# EAGLE board board_a_50mil (EAGLE 7.1.0), part 1 of 3
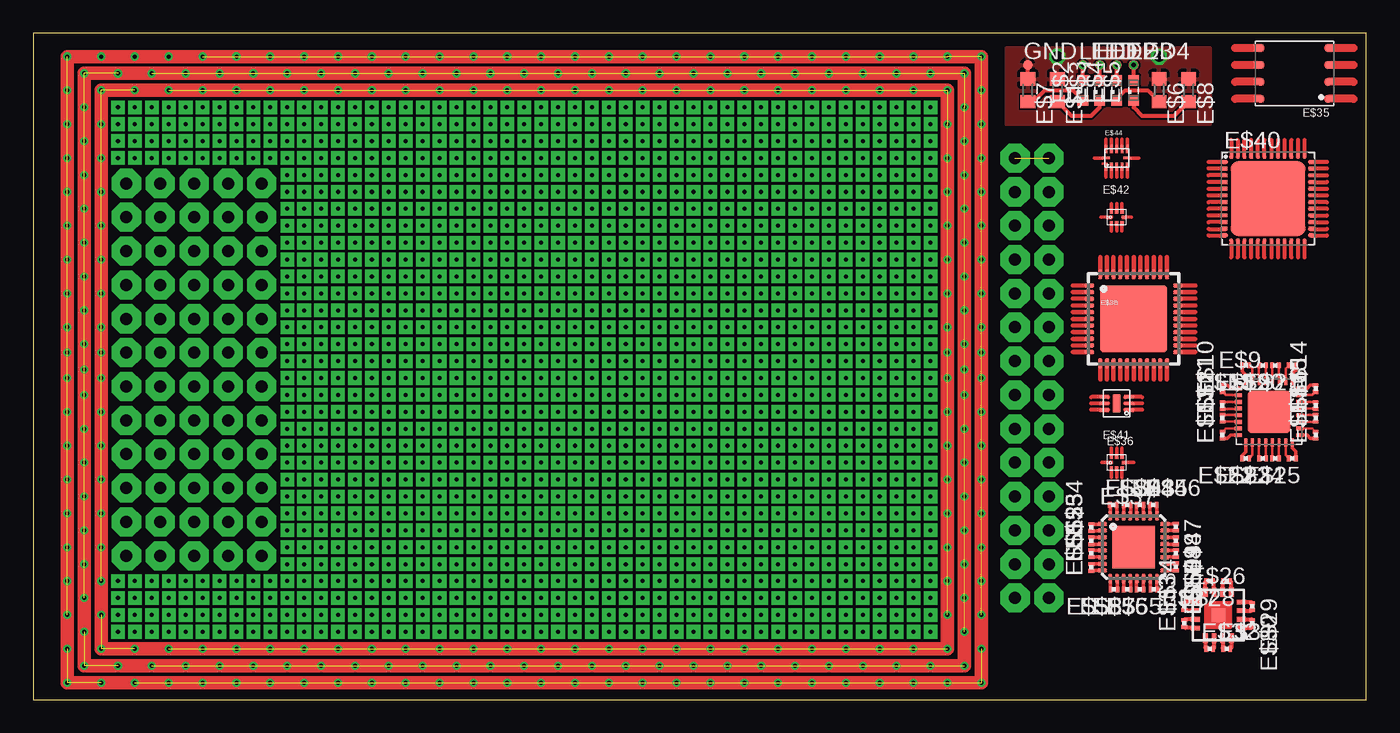
[diagram p0: board, top side]
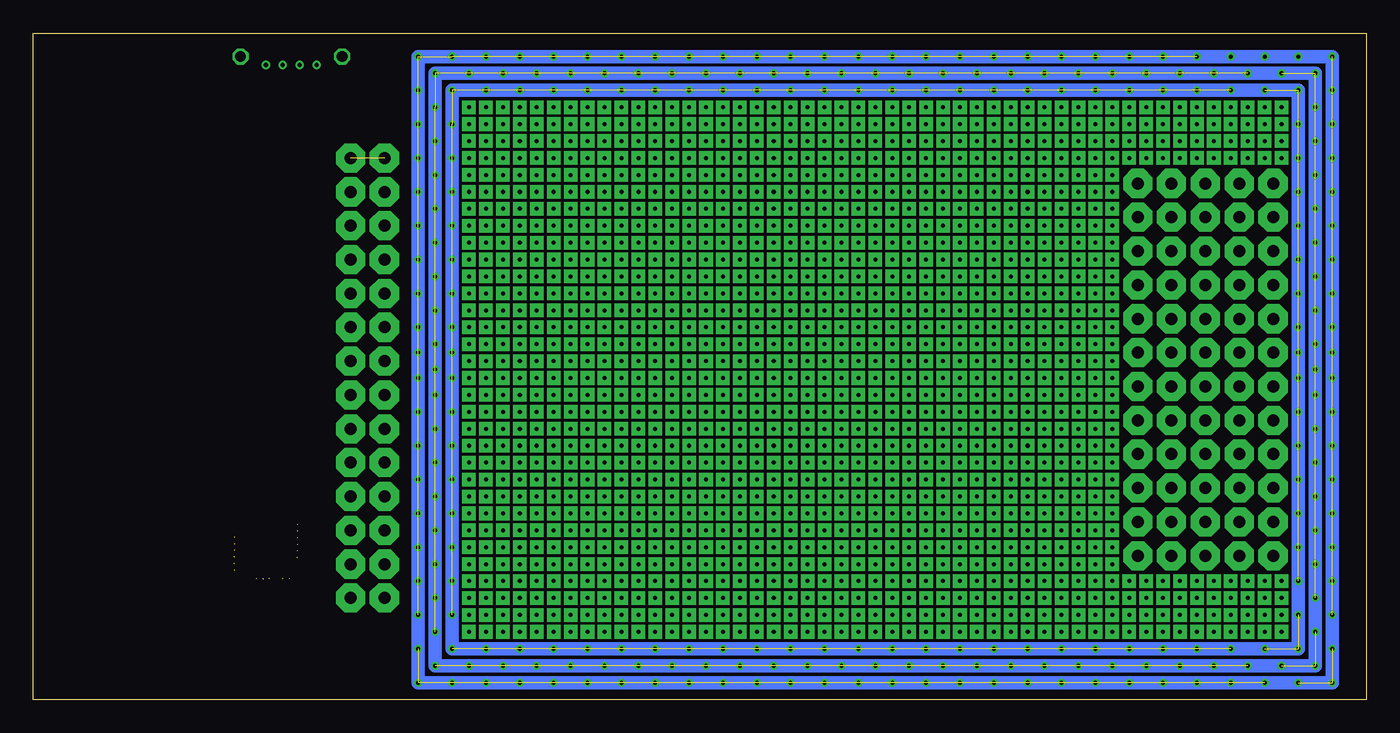
[diagram p1: board, bottom side, seen from below]

Size 100 x 50 mm. Coordinates in mm from the lower left corner, seen from the top.
Outline: 0,0 100,0 100,50 0,50 0,0
Copper layers (1*16): Top 0.035mm / dielectric 1.5mm / Bottom 0.035mm
Design rules "ITEADstudio_DRC *": minimum track width 6mil, minimum drill 12mil, track to track 6mil, track to pad 6mil, pad to pad 6mil, via to via 6mil, smd to smd 0mil, copper to edge 10mil, drill to drill 10mil, minimum pad ring 10mil, minimum via ring 6mil, stop-mask expansion 2mil, vias tented up to drill 100mil, thermal gap 10mil

## Footprints (pad centres in the part's own frame; a part is rotated, then mirrored left to right if it is on the bottom)
R0603 = smd 1 x 1.1: 1 -0.85,0; 2 0.85,0
SML0603 = smd 0.8 x 0.8: A 0.75,0; C -0.75,0
QFN32 = smd 0.6 x 0.3: 1 -2.3,1.75; 2 -2.3,1.25; 3 -2.3,0.75; 4 -2.3,0.25; 5 -2.3,-0.25; 6 -2.3,-0.75; 7 -2.3,-1.25; 8 -2.3,-1.75; 17 2.3,-1.75; 18 2.3,-1.25; 19 2.3,-0.75; 20 2.3,-0.25; 21 2.3,0.25; 22 2.3,0.75; 23 2.3,1.25; 24 2.3,1.75 | smd 0.3 x 0.6: 9 -1.75,-2.3; 10 -1.25,-2.3; 11 -0.75,-2.3; 12 -0.25,-2.3; 13 0.25,-2.3; 14 0.75,-2.3; 15 1.25,-2.3; 16 1.75,-2.3; 25 1.75,2.3; 26 1.25,2.3; 27 0.75,2.3; 28 0.25,2.3; 29 -0.25,2.3; 30 -0.75,2.3; 31 -1.25,2.3; 32 -1.75,2.3 | smd 3.2 x 3.2: EXP 0,0
R0201 = smd 0.28 x 0.43: 1 -0.255,0; 2 0.255,0
QFN16 = smd 0.7 x 0.35: 1 -1.725,0.975; 2 -1.725,0.325; 3 -1.725,-0.325; 4 -1.725,-0.975; 9 1.725,-0.975; 10 1.725,-0.325; 11 1.725,0.325; 12 1.725,0.975 | smd 0.35 x 0.7: 5 -0.975,-1.725; 6 -0.325,-1.725; 7 0.325,-1.725; 8 0.975,-1.725; 13 0.975,1.725; 14 0.325,1.725; 15 -0.325,1.725; 16 -0.975,1.725 | smd 1 x 1: TAB 0,0
DFN-S = smd 0.7 x 0.5: 1 -2.69,1.905; 2 -2.69,0.635; 3 -2.69,-0.635; 4 -2.69,-1.905; 5 2.69,-1.905; 6 2.69,-0.635; 7 2.69,0.635; 8 2.69,1.905
DFN6 = smd 0.25 x 0.7: 1 -0.5,-0.925; 2 0,-0.925; 3 0.5,-0.925; 4 0.5,0.925; 5 0,0.925; 6 -0.5,0.925 | smd 1.42 x 0.61: GND 0,0
MLF32-TH = smd 0.7 x 0.3: 1 -2.35,1.75; 2 -2.35,1.25; 3 -2.35,0.75; 4 -2.35,0.25; 5 -2.35,-0.25; 6 -2.35,-0.75; 7 -2.35,-1.25; 8 -2.35,-1.75; 17 2.35,-1.75; 18 2.35,-1.25; 19 2.35,-0.75; 20 2.35,-0.25; 21 2.35,0.25; 22 2.35,0.75; 23 2.35,1.25; 24 2.35,1.75 | smd 0.3 x 0.7: 9 -1.75,-2.35; 10 -1.25,-2.35; 11 -0.75,-2.35; 12 -0.25,-2.35; 13 0.25,-2.35; 14 0.75,-2.35; 15 1.25,-2.35; 16 1.75,-2.35; 25 1.75,2.35; 26 1.25,2.35; 27 0.75,2.35; 28 0.25,2.35; 29 -0.25,2.35; 30 -0.75,2.35; 31 -1.25,2.35; 32 -1.75,2.35 | smd 3.2 x 3.2: TH 0,0
MLF44-TH = smd 0.7 x 0.3: 1 -3.325,2.5; 2 -3.325,2; 3 -3.325,1.5; 4 -3.325,1; 5 -3.325,0.5; 6 -3.325,0; 7 -3.325,-0.5; 8 -3.325,-1; 9 -3.325,-1.5; 10 -3.325,-2; 11 -3.325,-2.5; 23 3.325,-2.5; 24 3.325,-2; 25 3.325,-1.5; 26 3.325,-1; 27 3.325,-0.5; 28 3.325,0; 29 3.325,0.5; 30 3.325,1; 31 3.325,1.5; 32 3.325,2; 33 3.325,2.5 | smd 0.3 x 0.7: 12 -2.5,-3.325; 13 -2,-3.325; 14 -1.5,-3.325; 15 -1,-3.325; 16 -0.5,-3.325; 17 0,-3.325; 18 0.5,-3.325; 19 1,-3.325; 20 1.5,-3.325; 21 2,-3.325; 22 2.5,-3.325; 34 2.5,3.325; 35 2,3.325; 36 1.5,3.325; 37 1,3.325; 38 0.5,3.325; 39 0,3.325; 40 -0.5,3.325; 41 -1,3.325; 42 -1.5,3.325; 43 -2,3.325; 44 -2.5,3.325 | smd 5 x 5: TH 0,0
QFN48 = smd 0.5 x 0.3: 1 -3.25,2.75; 2 -3.25,2.25; 3 -3.25,1.75; 4 -3.25,1.25; 5 -3.25,0.75; 6 -3.25,0.25; 7 -3.25,-0.25; 8 -3.25,-0.75; 9 -3.25,-1.25; 10 -3.25,-1.75; 11 -3.25,-2.25; 12 -3.25,-2.75; 25 3.25,-2.75; 26 3.25,-2.25; 27 3.25,-1.75; 28 3.25,-1.25; 29 3.25,-0.75; 30 3.25,-0.25; 31 3.25,0.25; 32 3.25,0.75; 33 3.25,1.25; 34 3.25,1.75; 35 3.25,2.25; 36 3.25,2.75 | smd 0.3 x 0.5: 13 -2.75,-3.25; 14 -2.25,-3.25; 15 -1.75,-3.25; 16 -1.25,-3.25; 17 -0.75,-3.25; 18 -0.25,-3.25; 19 0.25,-3.25; 20 0.75,-3.25; 21 1.25,-3.25; 22 1.75,-3.25; 23 2.25,-3.25; 24 2.75,-3.25; 37 2.75,3.25; 38 2.25,3.25; 39 1.75,3.25; 40 1.25,3.25; 41 0.75,3.25; 42 0.25,3.25; 43 -0.25,3.25; 44 -0.75,3.25; 45 -1.25,3.25; 46 -1.75,3.25; 47 -2.25,3.25; 48 -2.75,3.25 | smd 5.6 x 5.6: EXP 0,0
UMLP8 = smd 0.25 x 0.25: 1 -0.6,0 | smd 0.25 x 0.35: 2 -0.4,-0.45; 3 0,-0.45; 4 0.4,-0.45; 6 0.4,0.45; 7 0,0.45; 8 -0.4,0.45 | smd 0.35 x 0.25: 5 0.55,0
UQFN12 = smd 0.2 x 0.6: 1 -0.8,-0.65; 2 -0.4,-0.65; 3 0,-0.65; 4 0.4,-0.65; 5 0.8,-0.65; 7 0.8,0.65; 8 0.4,0.65; 9 0,0.65; 10 -0.4,0.65; 11 -0.8,0.65 | smd 0.6 x 0.2: 6 0.8,0; 12 -0.8,0
TP07R = smd 0.7 x 0.7: TP 0,0

## Placement (x,y rotation side)
E$1  [R0603]  76.83,45.72 270 top
E$2  [SML0603]  78.74,45.72 90 top
E$3  [SML0603]  80.01,45.72 90 top
E$4  [SML0603]  81.28,45.72 90 top
E$5  [SML0603]  82.55,45.72 90 top
E$6  [R0603]  84.45,45.72 270 top
E$7  [R0603]  74.61,45.72 270 top
E$8  [R0603]  86.68,45.72 270 top
E$9  [QFN32]  92.71,21.59 0 top
E$10  [R0201]  89.22,23.34 90 top
E$11  [R0201]  89.22,22.07 90 top
E$12  [R0201]  89.22,21.11 90 top
E$13  [R0201]  89.22,19.84 90 top
E$14  [R0201]  96.2,23.34 90 top
E$15  [R0201]  96.2,22.07 90 top
E$16  [R0201]  96.2,21.11 90 top
E$17  [R0201]  96.2,19.84 90 top
E$18  [R0201]  90.96,25.08 180 top
E$19  [R0201]  92.23,25.08 180 top
E$20  [R0201]  93.19,25.08 180 top
E$21  [R0201]  94.46,25.08 180 top
E$22  [R0201]  90.96,18.1 180 top
E$23  [R0201]  92.23,18.1 180 top
E$24  [R0201]  93.19,18.1 180 top
E$25  [R0201]  94.46,18.1 180 top
E$26  [QFN16]  88.9,6.35 0 top
E$27  [R0201]  88.27,8.89 180 top
E$28  [R0201]  89.53,8.89 180 top
E$29  [R0201]  91.44,6.99 270 top
E$30  [R0201]  91.44,5.71 270 top
E$31  [R0201]  89.53,3.81 0 top
E$32  [R0201]  88.27,3.81 0 top
E$33  [R0201]  86.36,5.71 90 top
E$34  [R0201]  86.36,6.99 90 top
E$35  [DFN-S]  94.61,46.99 180 top
E$36  [DFN6]  81.28,22.23 90 top
E$37  [MLF32-TH]  82.55,11.43 0 top
E$38  [MLF44-TH]  82.55,28.57 0 top
E$39  [R0201]  81.03,14.61 0 top
E$40  [QFN48]  92.63,37.59 0 top
E$41  [UMLP8]  81.28,17.78 0 top
E$42  [UMLP8]  81.28,36.2 0 top
E$43  [R0201]  82.07,14.61 0 top
E$44  [UQFN12]  81.28,40.64 0 top
E$45  [R0201]  83.03,14.61 0 top
E$46  [R0201]  84.02,14.61 0 top
E$47  [R0201]  85.72,12.95 270 top
E$48  [R0201]  85.72,11.91 270 top
E$49  [R0201]  85.72,10.95 270 top
E$50  [R0201]  85.72,9.96 270 top
E$51  [R0201]  79.38,9.91 90 top
E$52  [R0201]  79.38,10.95 90 top
E$53  [R0201]  79.38,11.91 90 top
E$54  [R0201]  79.38,12.9 90 top
E$55  [R0201]  84.07,8.26 180 top
E$56  [R0201]  83.03,8.26 180 top
E$57  [R0201]  82.07,8.26 180 top
E$58  [R0201]  81.08,8.26 180 top
GND_LED  [TP07R]  74.61,47.62 0 top
LED1  [TP07R]  78.74,47.62 0 top
LED2  [TP07R]  80.01,47.62 0 top
LED3  [TP07R]  81.28,47.62 0 top
LED4  [TP07R]  82.55,47.62 0 top

## Library data of the parts
E$1 E$6-E$8 E$10-E$25 E$27-E$34 E$39 E$43 E$45-E$58 = rcl
E$2-E$5 = led
E$9 = freescale
E$26 = ftdichip
E$35-E$38 E$40-E$42 E$44 = ibr_node
GND_LED LED1-LED4 = testpad

## Nets
GND: E$1.1 E$6.1 E$7.1 E$8.1 GND_LED.TP
LED1: E$2.A LED1.TP
LED2: E$3.A LED2.TP
LED3: E$4.A LED3.TP
LED4: E$5.A LED4.TP
S$128: E$37.32 E$39.1
S$131: E$37.31 E$39.2
S$132: E$37.30 E$43.1
S$136: E$37.29 E$43.2
S$137: E$37.28 E$45.1
S$142: E$37.27 E$45.2
S$289: E$37.26 E$46.1
S$290: E$37.25 E$46.2
S$291: E$37.24 E$47.1
S$292: E$37.23 E$47.2
S$293: E$37.22 E$48.1
S$294: E$37.21 E$48.2
S$295: E$37.20 E$49.1
S$296: E$37.19 E$49.2
S$297: E$37.18 E$50.1
S$298: E$37.17 E$50.2
S$299: E$37.8 E$51.1
S$300: E$37.7 E$51.2
S$301: E$37.6 E$52.1
S$302: E$37.5 E$52.2
S$303: E$37.4 E$53.1
S$304: E$37.3 E$53.2
S$305: E$37.2 E$54.1
S$306: E$37.1 E$54.2
S$307: E$37.16 E$55.1
S$308: E$37.15 E$55.2
S$309: E$37.14 E$56.1
S$310: E$37.13 E$56.2
S$311: E$37.12 E$57.1
S$312: E$57.2
S$313: E$37.10 E$58.1
S$314: E$37.9 E$58.2
S$1569: E$1.2 E$3.C
S$1570: E$4.C E$6.2
S$1571: E$5.C E$8.2
S$1572: E$2.C E$7.2
S$1573: E$9.1 E$10.2
S$1574: E$9.2 E$10.1
S$1575: E$9.3 E$11.2
S$1576: E$9.4 E$11.1
S$1577: E$9.5 E$12.2
S$1578: E$9.6 E$12.1
S$1579: E$9.7 E$13.2
S$1580: E$9.8 E$13.1
S$1581: E$9.24 E$14.2
S$1582: E$9.23 E$14.1
S$1583: E$9.22 E$15.2
S$1584: E$9.21 E$15.1
S$1585: E$9.20 E$16.2
S$1586: E$9.19 E$16.1
S$1587: E$9.18 E$17.2
S$1588: E$9.17 E$17.1
S$1589: E$9.32 E$18.2
S$1590: E$9.31 E$18.1
S$1591: E$9.30 E$19.2
S$1592: E$9.29 E$19.1
S$1593: E$9.28 E$20.2
S$1594: E$9.27 E$20.1
S$1595: E$9.26 E$21.2
S$1596: E$9.25 E$21.1
S$1597: E$9.9 E$22.2
S$1598: E$9.10 E$22.1
S$1599: E$9.11 E$23.2
S$1600: E$9.12 E$23.1
S$1601: E$9.13 E$24.2
S$1602: E$9.14 E$24.1
S$1603: E$9.15 E$25.2
S$1604: E$9.16 E$25.1
S$1660: E$26.16 E$27.2
S$1661: E$26.15 E$27.1
S$1662: E$26.14 E$28.2
S$1663: E$26.13 E$28.1
S$1664: E$26.12 E$29.1
S$1665: E$26.11 E$29.2
S$1666: E$26.10 E$30.1
S$1667: E$26.9 E$30.2
S$1668: E$26.8 E$31.2
S$1669: E$26.7 E$31.1
S$1670: E$26.6 E$32.2
S$1671: E$26.5 E$32.1
S$1672: E$26.4 E$33.1
S$1673: E$26.3 E$33.2
S$1674: E$26.2 E$34.1
S$1675: E$26.1 E$34.2

## Tracks (layer width: path | path; a pad name or v marks a point on that pad's centre or on a via)
GND  (via drill 0.8 pad 0.81)
  Top 0.305: E$7.1 GND_LED.TP
  other vias: 76.83,48.26 84.45,48.26
  pour Top: 73.03,48.9 88.27,48.9 88.27,43.18 73.03,43.18
LED1  (via drill 0.3)
  Top 0.305: E$2.A LED1.TP
  other vias: 78.74,47.62
LED2  (via drill 0.3)
  Top 0.305: E$3.A LED2.TP
  other vias: 80.01,47.62
LED3  (via drill 0.3)
  Top 0.305: E$4.A LED3.TP
  other vias: 81.28,47.62
LED4  (via drill 0.3)
  Top 0.305: E$5.A LED4.TP
  other vias: 82.55,47.62
PS1  (via drill 0.3)  (80 unrouted)
  Top 1.016: v68.58,45.72 v5.08,45.72 | v5.08,45.72 v5.08,3.81 v68.58,3.81 v68.58,45.72 | v68.58,45.72 v5.08,45.72
  Bottom 1.016: v5.08,45.72 v5.08,3.81 v68.58,3.81 v68.58,45.72 v5.08,45.72
  other vias: 5.08,43.18 5.08,40.64 5.08,38.1 5.08,35.56 5.08,33.02 5.08,30.48 5.08,27.94 5.08,26.04 5.08,24.13 5.08,21.59 5.08,19.05 5.08,16.51 5.08,13.97 5.08,11.43 5.08,8.89 5.08,6.35 68.58,24.13 68.58,21.59 68.58,19.05 68.58,16.51 68.58,13.97 68.58,11.43 68.58,8.89 68.58,6.35 68.58,43.18 68.58,40.64 68.58,38.1 68.58,35.56 68.58,33.02 68.58,30.48 68.58,27.94 68.58,26.04 7.62,3.81 10.16,3.81 12.7,3.81 15.24,3.81 17.78,3.81 20.32,3.81 22.86,3.81 25.4,3.81 27.94,3.81 30.48,3.81 33.02,3.81 35.56,3.81 38.1,3.81 40.64,3.81 43.18,3.81 45.72,3.81 48.26,3.81 50.8,3.81 53.34,3.81 55.88,3.81 58.42,3.81 60.96,3.81 63.5,3.81 66.04,3.81 66.04,45.72 63.5,45.72 60.96,45.72 58.42,45.72 55.88,45.72 53.34,45.72 50.8,45.72 48.26,45.72 45.72,45.72 43.18,45.72 40.64,45.72 7.62,45.72 10.16,45.72 12.7,45.72 15.24,45.72 17.78,45.72 20.32,45.72 22.86,45.72 25.4,45.72 27.94,45.72 30.48,45.72 33.02,45.72 35.56,45.72 38.1,45.72
PS2  (via drill 0.3)  (84 unrouted)
  Top 1.016: v69.85,46.99 v3.81,46.99 v3.81,2.54 v69.85,2.54 v69.85,46.99
  Bottom 1.016: v69.85,46.99 v3.81,46.99 v3.81,2.54 v69.85,2.54 v69.85,46.99
  other vias: 3.81,44.45 3.81,41.91 3.81,39.37 3.81,36.83 3.81,34.29 3.81,31.75 3.81,29.21 3.81,5.08 3.81,26.67 3.81,22.86 3.81,24.77 3.81,20.32 3.81,17.78 3.81,15.24 3.81,12.7 3.81,10.16 3.81,7.62 69.85,5.08 69.85,22.86 69.85,24.77 69.85,20.32 69.85,17.78 69.85,15.24 69.85,12.7 69.85,10.16 69.85,7.62 69.85,44.45 69.85,41.91 69.85,39.37 69.85,36.83 69.85,34.29 69.85,31.75 69.85,29.21 69.85,26.67 6.35,2.54 8.89,2.54 11.43,2.54 13.97,2.54 16.51,2.54 19.05,2.54 21.59,2.54 24.13,2.54 26.67,2.54 29.21,2.54 31.75,2.54 34.29,2.54 36.83,2.54 39.37,2.54 41.91,2.54 44.45,2.54 46.99,2.54 49.53,2.54 52.07,2.54 54.61,2.54 57.15,2.54 59.69,2.54 62.23,2.54 64.77,2.54 67.31,2.54 6.35,46.99 8.89,46.99 11.43,46.99 13.97,46.99 16.51,46.99 19.05,46.99 21.59,46.99 24.13,46.99 26.67,46.99 29.21,46.99 31.75,46.99 34.29,46.99 36.83,46.99 39.37,46.99 41.91,46.99 44.45,46.99 46.99,46.99 49.53,46.99 52.07,46.99 54.61,46.99 57.15,46.99 59.69,46.99 62.23,46.99 64.77,46.99 67.31,46.99
PS3  (via drill 0.3)  (85 unrouted)
  Top 1.016: v71.12,48.26 v10.16,48.26 v7.62,48.26 v5.08,48.26 v2.54,48.26 v2.54,1.27 v71.12,1.27 v71.12,48.26
  Bottom 1.016: v71.12,48.26 v2.54,48.26 v2.54,1.27 v71.12,1.27 v71.12,48.26
  other vias: 63.5,48.26 66.04,48.26 68.58,48.26 53.34,48.26 55.88,48.26 58.42,48.26 60.96,48.26 43.18,48.26 45.72,48.26 48.26,48.26 50.8,48.26 33.02,48.26 35.56,48.26 38.1,48.26 40.64,48.26 22.86,48.26 25.4,48.26 27.94,48.26 30.48,48.26 12.7,48.26 15.24,48.26 17.78,48.26 20.32,48.26 2.54,45.72 2.54,43.18 2.54,40.64 2.54,38.1 2.54,35.56 2.54,3.81 68.58,1.27 66.04,1.27 63.5,1.27 60.96,1.27 58.42,1.27 55.88,1.27 53.34,1.27 50.8,1.27 48.26,1.27 45.72,1.27 43.18,1.27 40.64,1.27 38.1,1.27 35.56,1.27 33.02,1.27 30.48,1.27 27.94,1.27 25.4,1.27 22.86,1.27 20.32,1.27 17.78,1.27 5.08,1.27 7.62,1.27 10.16,1.27 12.7,1.27 15.24,1.27 2.54,33.02 2.54,30.48 2.54,27.94 2.54,21.59 2.54,19.05 2.54,16.51 2.54,13.97 2.54,11.43 2.54,8.89 2.54,6.35 2.54,24.13 2.54,26.04 71.12,24.13 71.12,26.04 71.12,45.72 71.12,43.18 71.12,40.64 71.12,38.1 71.12,35.56 71.12,3.81 71.12,33.02 71.12,30.48 71.12,27.94 71.12,21.59 71.12,19.05 71.12,16.51 71.12,13.97 71.12,11.43 71.12,8.89 71.12,6.35
S$1  (via drill 0.3 pad 1.02)
  other vias: 8.89,44.45
S$2  (via drill 0.3 pad 1.02)
  other vias: 6.35,40.64
S$3  (via drill 0.3 pad 1.02)
  other vias: 11.43,43.18
S$4  (via drill 0.9 pad 2.18)
  other vias: 6.99,38.73
S$5  (via drill 0.9 pad 2.18)
  other vias: 6.99,36.2
S$6  (via drill 0.9 pad 2.18)
  other vias: 6.99,33.66
S$7  (via drill 0.9 pad 2.18)
  other vias: 6.99,31.11
S$8  (via drill 0.9 pad 2.18)
  other vias: 6.99,28.57
S$9  (via drill 0.9 pad 2.18)
  other vias: 6.99,26.04
S$10  (via drill 0.9 pad 2.18)
  other vias: 6.99,23.5
S$11  (via drill 0.3 pad 1.02)
  other vias: 8.89,40.64
S$12  (via drill 0.3 pad 1.02)
  other vias: 7.62,40.64
S$13  (via drill 0.3 pad 1.02)
  other vias: 6.35,41.91
S$14  (via drill 0.3 pad 1.02)
  other vias: 6.35,43.18
S$15  (via drill 0.3 pad 1.02)
  other vias: 6.35,44.45
S$16  (via drill 0.3 pad 1.02)
  other vias: 7.62,44.45
S$17  (via drill 0.3 pad 1.02)
  other vias: 7.62,43.18
S$18  (via drill 0.3 pad 1.02)
  other vias: 7.62,41.91
S$19  (via drill 0.3 pad 1.02)
  other vias: 8.89,41.91
S$20  (via drill 0.3 pad 1.02)
  other vias: 8.89,43.18
S$21  (via drill 0.3 pad 1.02)
  other vias: 11.43,44.45
S$22  (via drill 0.3 pad 1.02)
  other vias: 11.43,41.91
S$23  (via drill 0.3 pad 1.02)
  other vias: 10.16,41.91
S$24  (via drill 0.3 pad 1.02)
  other vias: 10.16,43.18
S$25  (via drill 0.3 pad 1.02)
  other vias: 10.16,40.64
S$26  (via drill 0.9 pad 2.18)
  other vias: 6.99,20.95
S$27  (via drill 0.3 pad 1.02)
  other vias: 11.43,40.64
S$28  (via drill 0.9 pad 2.18)
  other vias: 6.99,10.79
S$29  (via drill 0.9 pad 2.18)
  other vias: 6.99,13.34
S$30  (via drill 0.9 pad 2.18)
  other vias: 6.99,15.88
S$31  (via drill 0.9 pad 2.18)
  other vias: 6.99,18.41
S$32  (via drill 0.3 pad 1.02)
  other vias: 12.7,40.64
S$33  (via drill 0.3 pad 1.02)
  other vias: 12.7,41.91
S$34  (via drill 0.3 pad 1.02)
  other vias: 12.7,43.18
S$35  (via drill 0.3 pad 1.02)
  other vias: 12.7,44.45
S$36  (via drill 0.3 pad 1.02)
  other vias: 10.16,44.45
S$37  (via drill 0.3 pad 1.02)
  other vias: 13.97,41.91
S$38  (via drill 0.3 pad 1.02)
  other vias: 13.97,43.18
S$39  (via drill 0.3 pad 1.02)
  other vias: 13.97,44.45
S$40  (via drill 0.3 pad 1.02)
  other vias: 15.24,44.45
S$41  (via drill 0.3 pad 1.02)
  other vias: 15.24,41.91
S$42  (via drill 0.3 pad 1.02)
  other vias: 15.24,43.18
S$43  (via drill 0.3 pad 1.02)
  other vias: 16.51,41.91
S$44  (via drill 0.3 pad 1.02)
  other vias: 16.51,43.18
S$45  (via drill 0.3 pad 1.02)
  other vias: 16.51,44.45
S$46  (via drill 0.9 pad 2.18)
  other vias: 9.53,10.79
S$47  (via drill 0.9 pad 2.18)
  other vias: 12.06,10.79
S$48  (via drill 0.9 pad 2.18)
  other vias: 14.61,10.79
S$49  (via drill 0.9 pad 2.18)
  other vias: 17.14,10.79
S$50  (via drill 0.9 pad 2.18)
  other vias: 17.14,13.34
S$51  (via drill 0.9 pad 2.18)
  other vias: 9.53,13.34
S$52  (via drill 0.3 pad 1.02)
  other vias: 16.51,40.64
S$53  (via drill 0.3 pad 1.02)
  other vias: 15.24,40.64
S$54  (via drill 0.3 pad 1.02)
  other vias: 13.97,40.64
S$55  (via drill 0.3 pad 1.02)
  other vias: 20.32,44.45
S$56  (via drill 0.3 pad 1.02)
  other vias: 17.78,44.45
S$57  (via drill 0.3 pad 1.02)
  other vias: 19.05,44.45
S$58  (via drill 0.3 pad 1.02)
  other vias: 19.05,41.91
S$59  (via drill 0.3 pad 1.02)
  other vias: 17.78,41.91
S$60  (via drill 0.3 pad 1.02)
  other vias: 17.78,43.18
S$61  (via drill 0.3 pad 1.02)
  other vias: 20.32,41.91
S$62  (via drill 0.3 pad 1.02)
  other vias: 20.32,43.18
S$63  (via drill 0.3 pad 1.02)
  other vias: 19.05,43.18
S$64  (via drill 0.9 pad 2.18)
  other vias: 12.06,13.34
S$65  (via drill 0.3 pad 1.02)
  other vias: 17.78,40.64
S$66  (via drill 0.3 pad 1.02)
  other vias: 20.32,39.37
S$67  (via drill 0.3 pad 1.02)
  other vias: 20.32,40.64
S$68  (via drill 0.3 pad 1.02)
  other vias: 19.05,40.64
S$69  (via drill 0.3 pad 1.02)
  other vias: 19.05,39.37
S$70  (via drill 0.9 pad 2.18)
  other vias: 14.61,13.34
S$71  (via drill 0.3 pad 1.02)
  other vias: 20.32,38.1
S$72  (via drill 0.3 pad 1.02)
  other vias: 19.05,38.1
S$73  (via drill 0.9 pad 2.18)
  other vias: 17.14,15.88
S$74  (via drill 0.9 pad 2.18)
  other vias: 14.61,15.88
S$75  (via drill 0.9 pad 2.18)
  other vias: 12.06,15.88
S$76  (via drill 0.9 pad 2.18)
  other vias: 9.53,15.88
S$77  (via drill 0.9 pad 2.18)
  other vias: 9.53,38.73
S$78  (via drill 0.9 pad 2.18)
  other vias: 12.06,38.73
S$79  (via drill 0.9 pad 2.18)
  other vias: 14.61,38.73
S$80  (via drill 0.9 pad 2.18)
  other vias: 17.14,38.73
S$81  (via drill 0.9 pad 2.18)
  other vias: 17.14,36.2
S$82  (via drill 0.9 pad 2.18)
  other vias: 14.61,36.2
S$83  (via drill 0.9 pad 2.18)
  other vias: 12.06,36.2
S$84  (via drill 0.9 pad 2.18)
  other vias: 9.53,36.2
S$85  (via drill 0.9 pad 2.18)
  other vias: 9.53,33.66
S$86  (via drill 0.9 pad 2.18)
  other vias: 12.06,33.66
S$87  (via drill 0.9 pad 2.18)
  other vias: 14.61,33.66
S$88  (via drill 0.9 pad 2.18)
  other vias: 17.14,33.66
S$89  (via drill 0.9 pad 2.18)
  other vias: 17.14,31.11
S$90  (via drill 0.9 pad 2.18)
  other vias: 14.61,31.11
S$91  (via drill 0.9 pad 2.18)
  other vias: 12.06,31.11
S$92  (via drill 0.9 pad 2.18)
  other vias: 9.53,31.11
S$93  (via drill 0.9 pad 2.18)
  other vias: 9.53,28.57
S$94  (via drill 0.9 pad 2.18)
  other vias: 12.06,28.57
S$95  (via drill 0.9 pad 2.18)
  other vias: 14.61,28.57
S$96  (via drill 0.9 pad 2.18)
  other vias: 17.14,28.57
S$97  (via drill 0.9 pad 2.18)
  other vias: 9.53,26.04
S$98  (via drill 0.9 pad 2.18)
  other vias: 12.06,26.04
S$99  (via drill 0.9 pad 2.18)
  other vias: 14.61,26.04
S$100  (via drill 0.9 pad 2.18)
  other vias: 17.14,26.04
S$101  (via drill 0.9 pad 2.18)
  other vias: 17.14,23.5
S$102  (via drill 0.9 pad 2.18)
  other vias: 17.14,20.95
S$103  (via drill 0.9 pad 2.18)
  other vias: 17.14,18.41
S$104  (via drill 0.9 pad 2.18)
  other vias: 14.61,18.41
S$105  (via drill 0.9 pad 2.18)
  other vias: 14.61,20.95
S$106  (via drill 0.9 pad 2.18)
  other vias: 14.61,23.5
S$107  (via drill 0.9 pad 2.18)
  other vias: 12.06,23.5
S$108  (via drill 0.9 pad 2.18)
  other vias: 9.53,23.5
S$109  (via drill 0.9 pad 2.18)
  other vias: 9.53,18.41
S$110  (via drill 0.9 pad 2.18)
  other vias: 12.06,20.95
S$111  (via drill 0.9 pad 2.18)
  other vias: 12.06,18.41
S$112  (via drill 0.9 pad 2.18)
  other vias: 9.53,20.95
S$113
  Top 0.61: 92.08,48.9 90.17,48.9
S$114
  Top 0.61: 92.08,47.62 90.17,47.62
S$115
  Top 0.61: 92.08,46.35 90.17,46.35
S$116
  Top 0.61: 92.08,45.09 90.17,45.09
S$117
  Top 0.61: 99.06,45.09 97.16,45.09
S$118
  Top 0.61: 99.06,46.35 97.16,46.35
S$119
  Top 0.61: 99.06,47.62 97.16,47.62
S$120
  Top 0.61: 99.06,48.9 97.16,48.9
S$121
  Top 0.305: 83.19,22.23 81.92,22.23
S$122
  Top 0.305: 83.19,21.75 81.92,21.75
S$123
  Top 0.305: 80.64,21.75 79.38,21.75
S$124
  Top 0.305: 80.64,22.23 79.38,22.23
S$125
  Top 0.305: 80.64,22.7 79.38,22.7
S$126
  Top 0.305: 83.19,22.7 81.92,22.7
S$127  (via drill 0.3 pad 1.02)
  other vias: 20.32,36.83
S$128
  Top 0.254: E$37.32 80.8,14.61 E$39.1
S$129  (via drill 0.3 pad 1.02)
  other vias: 19.05,36.83
S$130  (via drill 0.3 pad 1.02)
  other vias: 19.05,34.29
S$131
  Top 0.254: E$39.2 arc-90 81.3,14.52 E$37.31
S$132
  Top 0.254: E$37.30 arc90 81.82,13.8 E$43.1
S$133  (via drill 0.3 pad 1.02)
  other vias: 20.32,34.29
S$134  (via drill 0.3 pad 1.02)
  other vias: 20.32,35.56
S$135  (via drill 0.3 pad 1.02)
  other vias: 19.05,35.56
S$136
  Top 0.254: E$37.29 arc90 82.33,13.81 E$43.2
S$137
  Top 0.254: E$37.28 arc-90 82.77,13.81 E$45.1
S$138  (via drill 0.3 pad 1.02)
  other vias: 20.32,31.75
S$139  (via drill 0.3 pad 1.02)
  other vias: 20.32,33.02
S$140  (via drill 0.3 pad 1.02)
  other vias: 19.05,33.02
S$141  (via drill 0.3 pad 1.02)
  other vias: 19.05,31.75
S$142
  Top 0.254: E$37.27 arc-90 83.28,13.8 E$45.2
S$143  (via drill 0.3 pad 1.02)
  other vias: 20.32,30.48
S$144  (via drill 0.3 pad 1.02)
  other vias: 19.05,30.48
S$145  (via drill 0.3 pad 1.02)
  other vias: 21.59,41.91
S$146  (via drill 0.3 pad 1.02)
  other vias: 21.59,43.18
S$147  (via drill 0.3 pad 1.02)
  other vias: 21.59,44.45
S$148  (via drill 0.3 pad 1.02)
  other vias: 22.86,44.45
S$149  (via drill 0.3 pad 1.02)
  other vias: 22.86,41.91
S$150  (via drill 0.3 pad 1.02)
  other vias: 22.86,43.18
S$151  (via drill 0.3 pad 1.02)
  other vias: 24.13,41.91
S$152  (via drill 0.3 pad 1.02)
  other vias: 24.13,43.18
S$153  (via drill 0.3 pad 1.02)
  other vias: 24.13,44.45
S$154  (via drill 0.3 pad 1.02)
  other vias: 21.59,39.37
S$155  (via drill 0.3 pad 1.02)
  other vias: 21.59,38.1
S$156  (via drill 0.3 pad 1.02)
  other vias: 22.86,39.37
S$157  (via drill 0.3 pad 1.02)
  other vias: 22.86,38.1
S$158  (via drill 0.3 pad 1.02)
  other vias: 24.13,38.1
S$159  (via drill 0.3 pad 1.02)
  other vias: 24.13,39.37
S$160  (via drill 0.3 pad 1.02)
  other vias: 24.13,40.64
S$161  (via drill 0.3 pad 1.02)
  other vias: 22.86,40.64
S$162  (via drill 0.3 pad 1.02)
  other vias: 21.59,40.64
S$163  (via drill 0.3 pad 1.02)
  other vias: 27.94,44.45
S$164  (via drill 0.3 pad 1.02)
  other vias: 25.4,44.45
S$165  (via drill 0.3 pad 1.02)
  other vias: 26.67,44.45
S$166  (via drill 0.3 pad 1.02)
  other vias: 26.67,41.91
S$167  (via drill 0.3 pad 1.02)
  other vias: 25.4,41.91
S$168  (via drill 0.3 pad 1.02)
  other vias: 25.4,43.18
S$169  (via drill 0.3 pad 1.02)
  other vias: 27.94,41.91
S$170  (via drill 0.3 pad 1.02)
  other vias: 27.94,43.18
S$171  (via drill 0.3 pad 1.02)
  other vias: 26.67,43.18
S$172  (via drill 0.3 pad 1.02)
  other vias: 25.4,39.37
S$173  (via drill 0.3 pad 1.02)
  other vias: 25.4,40.64
S$174  (via drill 0.3 pad 1.02)
  other vias: 27.94,39.37
S$175  (via drill 0.3 pad 1.02)
  other vias: 27.94,40.64
S$176  (via drill 0.3 pad 1.02)
  other vias: 26.67,40.64
S$177  (via drill 0.3 pad 1.02)
  other vias: 26.67,39.37
S$178  (via drill 0.3 pad 1.02)
  other vias: 25.4,38.1
S$179  (via drill 0.3 pad 1.02)
  other vias: 27.94,38.1
S$180  (via drill 0.3 pad 1.02)
  other vias: 26.67,38.1
S$181  (via drill 0.3 pad 1.02)
  other vias: 29.21,41.91
S$182  (via drill 0.3 pad 1.02)
  other vias: 29.21,43.18
S$183  (via drill 0.3 pad 1.02)
  other vias: 29.21,44.45
S$184  (via drill 0.3 pad 1.02)
  other vias: 30.48,44.45
S$185  (via drill 0.3 pad 1.02)
  other vias: 30.48,41.91
S$186  (via drill 0.3 pad 1.02)
  other vias: 30.48,43.18
S$187  (via drill 0.3 pad 1.02)
  other vias: 31.75,41.91
S$188  (via drill 0.3 pad 1.02)
  other vias: 31.75,43.18
S$189  (via drill 0.3 pad 1.02)
  other vias: 31.75,44.45
S$190  (via drill 0.3 pad 1.02)
  other vias: 29.21,39.37
S$191  (via drill 0.3 pad 1.02)
  other vias: 29.21,38.1
S$192  (via drill 0.3 pad 1.02)
  other vias: 30.48,39.37
S$193  (via drill 0.3 pad 1.02)
  other vias: 30.48,38.1
S$194  (via drill 0.3 pad 1.02)
  other vias: 31.75,38.1
S$195  (via drill 0.3 pad 1.02)
  other vias: 31.75,39.37
S$196  (via drill 0.3 pad 1.02)
  other vias: 31.75,40.64
S$197  (via drill 0.3 pad 1.02)
  other vias: 30.48,40.64
S$198  (via drill 0.3 pad 1.02)
  other vias: 29.21,40.64
S$199  (via drill 0.3 pad 1.02)
  other vias: 35.56,44.45
S$200  (via drill 0.3 pad 1.02)
  other vias: 33.02,44.45
S$201  (via drill 0.3 pad 1.02)
  other vias: 34.29,44.45
S$202  (via drill 0.3 pad 1.02)
  other vias: 34.29,41.91
S$203  (via drill 0.3 pad 1.02)
  other vias: 33.02,41.91
S$204  (via drill 0.3 pad 1.02)
  other vias: 33.02,43.18
S$205  (via drill 0.3 pad 1.02)
  other vias: 35.56,41.91
S$206  (via drill 0.3 pad 1.02)
  other vias: 35.56,43.18
S$207  (via drill 0.3 pad 1.02)
  other vias: 34.29,43.18
S$208  (via drill 0.3 pad 1.02)
  other vias: 33.02,39.37
S$209  (via drill 0.3 pad 1.02)
  other vias: 33.02,40.64
S$210  (via drill 0.3 pad 1.02)
  other vias: 35.56,39.37
S$211  (via drill 0.3 pad 1.02)
  other vias: 35.56,40.64
S$212  (via drill 0.3 pad 1.02)
  other vias: 34.29,40.64
S$213  (via drill 0.3 pad 1.02)
  other vias: 34.29,39.37
S$214  (via drill 0.3 pad 1.02)
  other vias: 33.02,38.1
S$215  (via drill 0.3 pad 1.02)
  other vias: 35.56,38.1
S$216  (via drill 0.3 pad 1.02)
  other vias: 34.29,38.1
S$217  (via drill 0.3 pad 1.02)
  other vias: 21.59,34.29
S$218  (via drill 0.3 pad 1.02)
  other vias: 21.59,35.56
S$219  (via drill 0.3 pad 1.02)
  other vias: 21.59,36.83
S$220  (via drill 0.3 pad 1.02)
  other vias: 22.86,36.83
S$221  (via drill 0.3 pad 1.02)
  other vias: 22.86,34.29
S$222  (via drill 0.3 pad 1.02)
  other vias: 22.86,35.56
S$223  (via drill 0.3 pad 1.02)
  other vias: 24.13,34.29
S$224  (via drill 0.3 pad 1.02)
  other vias: 24.13,35.56
S$225  (via drill 0.3 pad 1.02)
  other vias: 24.13,36.83
S$226  (via drill 0.3 pad 1.02)
  other vias: 21.59,31.75
S$227  (via drill 0.3 pad 1.02)
  other vias: 21.59,30.48
S$228  (via drill 0.3 pad 1.02)
  other vias: 22.86,31.75
S$229  (via drill 0.3 pad 1.02)
  other vias: 22.86,30.48
S$230  (via drill 0.3 pad 1.02)
  other vias: 24.13,30.48
S$231  (via drill 0.3 pad 1.02)
  other vias: 24.13,31.75
S$232  (via drill 0.3 pad 1.02)
  other vias: 24.13,33.02
S$233  (via drill 0.3 pad 1.02)
  other vias: 22.86,33.02
S$234  (via drill 0.3 pad 1.02)
  other vias: 21.59,33.02
S$235  (via drill 0.3 pad 1.02)
  other vias: 27.94,36.83
S$236  (via drill 0.3 pad 1.02)
  other vias: 25.4,36.83
S$237  (via drill 0.3 pad 1.02)
  other vias: 26.67,36.83
S$238  (via drill 0.3 pad 1.02)
  other vias: 26.67,34.29
S$239  (via drill 0.3 pad 1.02)
  other vias: 25.4,34.29
S$240  (via drill 0.3 pad 1.02)
  other vias: 25.4,35.56
S$241  (via drill 0.3 pad 1.02)
  other vias: 27.94,34.29
S$242  (via drill 0.3 pad 1.02)
  other vias: 27.94,35.56
S$243  (via drill 0.3 pad 1.02)
  other vias: 26.67,35.56
S$244  (via drill 0.3 pad 1.02)
  other vias: 25.4,31.75
S$245  (via drill 0.3 pad 1.02)
  other vias: 25.4,33.02
S$246  (via drill 0.3 pad 1.02)
  other vias: 27.94,31.75
S$247  (via drill 0.3 pad 1.02)
  other vias: 27.94,33.02
S$248  (via drill 0.3 pad 1.02)
  other vias: 26.67,33.02
S$249  (via drill 0.3 pad 1.02)
  other vias: 26.67,31.75
S$250  (via drill 0.3 pad 1.02)
  other vias: 25.4,30.48
S$251  (via drill 0.3 pad 1.02)
  other vias: 27.94,30.48
S$252  (via drill 0.3 pad 1.02)
  other vias: 26.67,30.48
S$253  (via drill 0.3 pad 1.02)
  other vias: 29.21,34.29
S$254  (via drill 0.3 pad 1.02)
  other vias: 29.21,35.56
S$255  (via drill 0.3 pad 1.02)
  other vias: 29.21,36.83
S$256  (via drill 0.3 pad 1.02)
  other vias: 30.48,36.83
S$257  (via drill 0.3 pad 1.02)
  other vias: 30.48,34.29
S$258  (via drill 0.3 pad 1.02)
  other vias: 30.48,35.56
S$259  (via drill 0.3 pad 1.02)
  other vias: 31.75,34.29
S$260  (via drill 0.3 pad 1.02)
  other vias: 31.75,35.56
S$261  (via drill 0.3 pad 1.02)
  other vias: 31.75,36.83
S$262  (via drill 0.3 pad 1.02)
  other vias: 29.21,31.75
S$263  (via drill 0.3 pad 1.02)
  other vias: 29.21,30.48
S$264  (via drill 0.3 pad 1.02)
  other vias: 30.48,31.75
S$265  (via drill 0.3 pad 1.02)
  other vias: 30.48,30.48
S$266  (via drill 0.3 pad 1.02)
  other vias: 31.75,30.48
S$267  (via drill 0.3 pad 1.02)
  other vias: 31.75,31.75
S$268  (via drill 0.3 pad 1.02)
  other vias: 31.75,33.02
S$269  (via drill 0.3 pad 1.02)
  other vias: 30.48,33.02
S$270  (via drill 0.3 pad 1.02)
  other vias: 29.21,33.02
S$271  (via drill 0.3 pad 1.02)
  other vias: 35.56,36.83
S$272  (via drill 0.3 pad 1.02)
  other vias: 33.02,36.83
S$273  (via drill 0.3 pad 1.02)
  other vias: 34.29,36.83
S$274  (via drill 0.3 pad 1.02)
  other vias: 34.29,34.29
S$275  (via drill 0.3 pad 1.02)
  other vias: 33.02,34.29
S$276  (via drill 0.3 pad 1.02)
  other vias: 33.02,35.56
S$277  (via drill 0.3 pad 1.02)
  other vias: 35.56,34.29
S$278  (via drill 0.3 pad 1.02)
  other vias: 35.56,35.56
S$279  (via drill 0.3 pad 1.02)
  other vias: 34.29,35.56
S$280  (via drill 0.3 pad 1.02)
  other vias: 33.02,31.75
S$281  (via drill 0.3 pad 1.02)
  other vias: 33.02,33.02
S$282  (via drill 0.3 pad 1.02)
  other vias: 35.56,31.75
S$283  (via drill 0.3 pad 1.02)
  other vias: 35.56,33.02
S$284  (via drill 0.3 pad 1.02)
  other vias: 34.29,33.02
S$285  (via drill 0.3 pad 1.02)
  other vias: 34.29,31.75
S$286  (via drill 0.3 pad 1.02)
  other vias: 33.02,30.48
S$287  (via drill 0.3 pad 1.02)
  other vias: 35.56,30.48
S$288  (via drill 0.3 pad 1.02)
  other vias: 34.29,30.48
S$289
  Top 0.254: E$37.26 arc-90 83.77,13.81 E$46.1
S$290
  Top 0.254: E$37.25 arc-90 84.28,13.8 E$46.2
S$291
  Top 0.254: E$37.24 85.72,13.18 E$47.1
S$292
  Top 0.254: E$47.2 arc-90 85.64,12.68 E$37.23
S$293  (1 unrouted)
  Top 0.254: 84.92,12.16 E$48.1
S$294  (1 unrouted)
  Top 0.254: 84.93,11.65 E$48.2
S$295  (1 unrouted)
  Top 0.254: 84.93,11.21 E$49.1
S$296  (1 unrouted)
  Top 0.254: 84.92,10.7 E$49.2
S$297  (1 unrouted)
  Top 0.254: 84.93,10.21 E$50.1
S$298  (1 unrouted)
  Top 0.254: 84.92,9.7 E$50.2
S$299
  Top 0.254: E$37.8 79.38,9.68 E$51.1
S$300
  Top 0.254: E$51.2 arc-90 79.46,10.18 E$37.7
S$301  (1 unrouted)
  Top 0.254: 80.18,10.7 E$52.1
S$302  (1 unrouted)
  Top 0.254: 80.17,11.21 E$52.2
S$303  (1 unrouted)
  Top 0.254: 80.17,11.65 E$53.1
S$304  (1 unrouted)
  Top 0.254: 80.18,12.16 E$53.2
S$305  (1 unrouted)
  Top 0.254: 80.17,12.65 E$54.1
S$306  (1 unrouted)
  Top 0.254: 80.18,13.16 E$54.2
S$307
  Top 0.254: E$37.16 84.3,8.26 E$55.1
S$308
  Top 0.254: E$55.2 arc-90 83.8,8.34 E$37.15
S$309  (1 unrouted)
  Top 0.254: 83.28,9.06 E$56.1
S$310  (1 unrouted)
  Top 0.254: 82.77,9.05 E$56.2
S$311  (1 unrouted)
  Top 0.254: 82.33,9.05 E$57.1
S$312
  Top 0.254: 81.82,9.06 E$57.2
S$313  (1 unrouted)
  Top 0.254: 81.33,9.05 E$58.1
S$314  (1 unrouted)
  Top 0.254: 80.82,9.06 E$58.2
S$315
  Top 0.254: 80.64,17.78 80.17,17.78
S$316
  Top 0.254: 81.92,17.78 82.55,17.78
S$317
  Top 0.254: 81.28,18.26 81.28,18.89
S$318
  Top 0.254: 81.28,17.3 81.28,16.67
S$319
  Top 0.254: 80.88,18.26 80.88,18.89
S$320
  Top 0.254: 81.68,18.18 81.68,18.89
S$321
  Top 0.254: 81.68,17.38 81.68,16.67
S$322
  Top 0.254: 80.88,17.3 80.88,16.67
S$323
  Top 0.254: 82.39,36.2 81.76,36.2
S$324
  Top 0.254: 80.72,36.2 80.09,36.2
S$325
  Top 0.254: 80.88,36.59 80.88,37.23
S$326
  Top 0.254: 81.28,36.59 81.28,37.23
S$327
  Top 0.254: 81.68,36.59 81.68,37.23
S$328
  Top 0.254: 80.88,35.16 80.88,35.8
S$329
  Top 0.254: 81.28,35.16 81.28,35.8
S$330
  Top 0.254: 81.68,35.16 81.68,35.8
S$331
  Top 0.254: 80.49,39.21 80.49,39.85
S$332
  Top 0.254: 80.88,39.21 80.88,39.85
S$333
  Top 0.254: 81.28,39.21 81.28,39.85
S$334
  Top 0.254: 81.68,39.21 81.68,39.85
S$335
  Top 0.254: 82.07,39.21 82.07,39.85
S$336
  Top 0.254: 82.95,40.64 82.31,40.64
S$337
  Top 0.254: 82.07,41.43 82.07,42.07
S$338
  Top 0.254: 81.68,41.43 81.68,42.07
S$339
  Top 0.254: 81.28,41.43 81.28,42.07
S$340
  Top 0.254: 80.88,41.43 80.88,42.07
S$341
  Top 0.254: 80.49,41.43 80.49,42.07
S$342
  Top 0.254: 80.25,40.64 79.61,40.64
S$343  (via drill 0.3 pad 1.02)
  other vias: 20.32,29.21
S$344
  Top 0.305: 89.46,39.85 88.19,39.85
S$345  (via drill 0.3 pad 1.02)
  other vias: 19.05,29.21
S$346  (via drill 0.3 pad 1.02)
  other vias: 19.05,26.67
S$347
  Top 0.305: 89.46,40.34 88.19,40.34
S$348
  Top 0.305: 88.19,38.34 89.46,38.34
S$349  (via drill 0.3 pad 1.02)
  other vias: 20.32,26.67
S$350  (via drill 0.3 pad 1.02)
  other vias: 20.32,27.94
S$351  (via drill 0.3 pad 1.02)
  other vias: 19.05,27.94
S$352
  Top 0.305: 88.19,37.84 89.46,37.84
S$353
  Top 0.305: 89.46,36.83 88.19,36.83
S$354  (via drill 0.3 pad 1.02)
  other vias: 20.32,24.13
S$355  (via drill 0.3 pad 1.02)
  other vias: 20.32,25.4
S$356  (via drill 0.3 pad 1.02)
  other vias: 19.05,25.4
S$357  (via drill 0.3 pad 1.02)
  other vias: 19.05,24.13
S$358
  Top 0.305: 89.46,37.33 88.19,37.33
S$359  (via drill 0.3 pad 1.02)
  other vias: 20.32,22.86
S$360  (via drill 0.3 pad 1.02)
  other vias: 19.05,22.86
S$361
  Top 0.305: 89.46,38.84 88.19,38.84
S$362
  Top 0.305: 89.46,39.34 88.19,39.34
S$363
  Top 0.305: 88.19,35.32 89.46,35.32
S$364
  Top 0.305: 88.19,34.83 89.46,34.83
S$365
  Top 0.305: 89.46,36.33 88.19,36.33
S$366
  Top 0.305: 89.46,35.82 88.19,35.82
S$367
  Top 0.305: 95.81,35.32 97.08,35.32
S$368
  Top 0.305: 95.81,34.83 97.08,34.83
S$369
  Top 0.305: 97.08,36.83 95.81,36.83
S$370
  Top 0.305: 97.08,37.33 95.81,37.33
S$371
  Top 0.305: 95.81,35.82 97.08,35.82
S$372
  Top 0.305: 95.81,36.33 97.08,36.33
S$373
  Top 0.305: 95.81,38.34 97.08,38.34
S$374
  Top 0.305: 95.81,37.84 97.08,37.84
S$375
  Top 0.305: 97.08,39.85 95.81,39.85
S$376
  Top 0.305: 97.08,40.34 95.81,40.34
S$377
  Top 0.305: 95.81,38.84 97.08,38.84
S$378
  Top 0.305: 95.81,39.35 97.08,39.35
S$379
  Top 0.305: 94.89,40.72 94.89,41.99
S$380
  Top 0.305: 95.39,40.72 95.39,41.99
S$381
  Top 0.305: 93.39,41.99 93.39,40.72
S$382
  Top 0.305: 92.89,41.99 92.89,40.72
S$383
  Top 0.305: 94.39,40.72 94.39,41.99
S$384
  Top 0.305: 93.88,40.72 93.88,41.99
S$385
  Top 0.305: 91.88,40.72 91.88,41.99
S$386
  Top 0.305: 92.37,40.72 92.37,41.99
S$387
  Top 0.305: 90.37,41.99 90.37,40.72
S$388
  Top 0.305: 89.87,41.99 89.87,40.72
S$389
  Top 0.305: 91.38,40.72 91.38,41.99
S$390
  Top 0.305: 90.87,40.72 90.87,41.99
S$391
  Top 0.305: 94.89,33.18 94.89,34.45
S$392
  Top 0.305: 95.39,33.18 95.39,34.45
S$393
  Top 0.305: 93.39,34.45 93.39,33.18
S$394
  Top 0.305: 92.89,34.45 92.89,33.18
S$395
  Top 0.305: 94.39,33.18 94.39,34.45
S$396
  Top 0.305: 93.88,33.18 93.88,34.45
S$397
  Top 0.305: 91.88,33.18 91.88,34.45
S$398
  Top 0.305: 92.37,33.18 92.37,34.45
S$399
  Top 0.305: 90.37,34.45 90.37,33.18
S$400
  Top 0.305: 89.87,34.45 89.87,33.18
S$401
  Top 0.305: 91.38,33.18 91.38,34.45
S$402
  Top 0.305: 90.87,33.18 90.87,34.45
S$403
  Top 0.356: 79.42,31.07 77.99,31.07
S$404
  Top 0.356: 79.42,30.6 77.99,30.6
S$405
  Top 0.356: 79.42,30.08 77.99,30.08
S$406
  Top 0.356: 79.42,29.57 77.99,29.57
S$407
  Top 0.356: 79.42,29.09 77.99,29.09
S$408
  Top 0.356: 79.42,28.57 77.99,28.57
S$409
  Top 0.356: 79.42,28.06 77.99,28.06
S$410
  Top 0.356: 79.42,27.58 77.99,27.58
S$411
  Top 0.356: 79.42,27.07 77.99,27.07
S$412
  Top 0.356: 79.42,26.55 77.99,26.55
S$413
  Top 0.356: 79.42,26.07 77.99,26.07
S$414
  Top 0.356: 80.05,25.44 80.05,24.01
S$415  (via drill 0.3 pad 1.02)
  other vias: 20.32,21.59
S$416
  Top 0.356: 80.53,25.44 80.53,24.01
S$417  (via drill 0.3 pad 1.02)
  other vias: 19.05,21.59
S$418  (via drill 0.3 pad 1.02)
  other vias: 19.05,19.05
S$419
  Top 0.356: 81.04,25.44 81.04,24.01
S$420
  Top 0.356: 81.56,25.44 81.56,24.01
S$421  (via drill 0.3 pad 1.02)
  other vias: 20.32,19.05
S$422  (via drill 0.3 pad 1.02)
  other vias: 20.32,20.32
S$423  (via drill 0.3 pad 1.02)
  other vias: 19.05,20.32
S$424
  Top 0.356: 82.03,25.44 82.03,24.01
S$425
  Top 0.356: 82.55,25.44 82.55,24.01
S$426  (via drill 0.3 pad 1.02)
  other vias: 20.32,16.51
S$427  (via drill 0.3 pad 1.02)
  other vias: 20.32,17.78
S$428  (via drill 0.3 pad 1.02)
  other vias: 19.05,17.78
S$429  (via drill 0.3 pad 1.02)
  other vias: 19.05,16.51
S$430
  Top 0.356: 83.07,25.44 83.07,24.01
S$431  (via drill 0.3 pad 1.02)
  other vias: 20.32,15.24
S$432  (via drill 0.3 pad 1.02)
  other vias: 19.05,15.24
S$433  (via drill 0.3 pad 1.02)
  other vias: 21.59,26.67
S$434  (via drill 0.3 pad 1.02)
  other vias: 21.59,27.94
S$435  (via drill 0.3 pad 1.02)
  other vias: 21.59,29.21
S$436  (via drill 0.3 pad 1.02)
  other vias: 22.86,29.21
S$437  (via drill 0.3 pad 1.02)
  other vias: 22.86,26.67
S$438  (via drill 0.3 pad 1.02)
  other vias: 22.86,27.94
S$439  (via drill 0.3 pad 1.02)
  other vias: 24.13,26.67
S$440  (via drill 0.3 pad 1.02)
  other vias: 24.13,27.94
S$441  (via drill 0.3 pad 1.02)
  other vias: 24.13,29.21
S$442  (via drill 0.3 pad 1.02)
  other vias: 21.59,24.13
S$443  (via drill 0.3 pad 1.02)
  other vias: 21.59,22.86
S$444  (via drill 0.3 pad 1.02)
  other vias: 22.86,24.13
S$445  (via drill 0.3 pad 1.02)
  other vias: 22.86,22.86
S$446  (via drill 0.3 pad 1.02)
  other vias: 24.13,22.86
S$447  (via drill 0.3 pad 1.02)
  other vias: 24.13,24.13
S$448  (via drill 0.3 pad 1.02)
  other vias: 24.13,25.4
S$449  (via drill 0.3 pad 1.02)
  other vias: 22.86,25.4
S$450  (via drill 0.3 pad 1.02)
  other vias: 21.59,25.4
S$451  (via drill 0.3 pad 1.02)
  other vias: 27.94,29.21
S$452  (via drill 0.3 pad 1.02)
  other vias: 25.4,29.21
S$453  (via drill 0.3 pad 1.02)
  other vias: 26.67,29.21
S$454  (via drill 0.3 pad 1.02)
  other vias: 26.67,26.67
S$455  (via drill 0.3 pad 1.02)
  other vias: 25.4,26.67
S$456  (via drill 0.3 pad 1.02)
  other vias: 25.4,27.94
S$457  (via drill 0.3 pad 1.02)
  other vias: 27.94,26.67
S$458  (via drill 0.3 pad 1.02)
  other vias: 27.94,27.94
S$459  (via drill 0.3 pad 1.02)
  other vias: 26.67,27.94
S$460  (via drill 0.3 pad 1.02)
  other vias: 25.4,24.13
S$461  (via drill 0.3 pad 1.02)
  other vias: 25.4,25.4
S$462  (via drill 0.3 pad 1.02)
  other vias: 27.94,24.13
S$463  (via drill 0.3 pad 1.02)
  other vias: 27.94,25.4
S$464  (via drill 0.3 pad 1.02)
  other vias: 26.67,25.4
S$465  (via drill 0.3 pad 1.02)
  other vias: 26.67,24.13
S$466  (via drill 0.3 pad 1.02)
  other vias: 25.4,22.86
S$467  (via drill 0.3 pad 1.02)
  other vias: 27.94,22.86
S$468  (via drill 0.3 pad 1.02)
  other vias: 26.67,22.86
S$469  (via drill 0.3 pad 1.02)
  other vias: 29.21,26.67
S$470  (via drill 0.3 pad 1.02)
  other vias: 29.21,27.94
S$471  (via drill 0.3 pad 1.02)
  other vias: 29.21,29.21
S$472  (via drill 0.3 pad 1.02)
  other vias: 30.48,29.21
S$473  (via drill 0.3 pad 1.02)
  other vias: 30.48,26.67
S$474  (via drill 0.3 pad 1.02)
  other vias: 30.48,27.94
S$475  (via drill 0.3 pad 1.02)
  other vias: 31.75,26.67
S$476  (via drill 0.3 pad 1.02)
  other vias: 31.75,27.94
S$477  (via drill 0.3 pad 1.02)
  other vias: 31.75,29.21
S$478  (via drill 0.3 pad 1.02)
  other vias: 29.21,24.13
S$479  (via drill 0.3 pad 1.02)
  other vias: 29.21,22.86
S$480  (via drill 0.3 pad 1.02)
  other vias: 30.48,24.13
S$481  (via drill 0.3 pad 1.02)
  other vias: 30.48,22.86
S$482  (via drill 0.3 pad 1.02)
  other vias: 31.75,22.86
S$483  (via drill 0.3 pad 1.02)
  other vias: 31.75,24.13
S$484  (via drill 0.3 pad 1.02)
  other vias: 31.75,25.4
S$485  (via drill 0.3 pad 1.02)
  other vias: 30.48,25.4
S$486  (via drill 0.3 pad 1.02)
  other vias: 29.21,25.4
S$487  (via drill 0.3 pad 1.02)
  other vias: 35.56,29.21
S$488  (via drill 0.3 pad 1.02)
  other vias: 33.02,29.21
S$489  (via drill 0.3 pad 1.02)
  other vias: 34.29,29.21
S$490  (via drill 0.3 pad 1.02)
  other vias: 34.29,26.67
S$491  (via drill 0.3 pad 1.02)
  other vias: 33.02,26.67
S$492  (via drill 0.3 pad 1.02)
  other vias: 33.02,27.94
S$493  (via drill 0.3 pad 1.02)
  other vias: 35.56,26.67
S$494  (via drill 0.3 pad 1.02)
  other vias: 35.56,27.94
S$495  (via drill 0.3 pad 1.02)
  other vias: 34.29,27.94
S$496  (via drill 0.3 pad 1.02)
  other vias: 33.02,24.13
S$497  (via drill 0.3 pad 1.02)
  other vias: 33.02,25.4
S$498  (via drill 0.3 pad 1.02)
  other vias: 35.56,24.13
S$499  (via drill 0.3 pad 1.02)
  other vias: 35.56,25.4
S$500  (via drill 0.3 pad 1.02)
  other vias: 34.29,25.4
S$501  (via drill 0.3 pad 1.02)
  other vias: 34.29,24.13
S$502  (via drill 0.3 pad 1.02)
  other vias: 33.02,22.86
S$503  (via drill 0.3 pad 1.02)
  other vias: 35.56,22.86
S$504  (via drill 0.3 pad 1.02)
  other vias: 34.29,22.86
S$505  (via drill 0.3 pad 1.02)
  other vias: 21.59,19.05
S$506  (via drill 0.3 pad 1.02)
  other vias: 21.59,20.32
S$507  (via drill 0.3 pad 1.02)
  other vias: 21.59,21.59
S$508  (via drill 0.3 pad 1.02)
  other vias: 22.86,21.59
S$509  (via drill 0.3 pad 1.02)
  other vias: 22.86,19.05
S$510  (via drill 0.3 pad 1.02)
  other vias: 22.86,20.32
S$511  (via drill 0.3 pad 1.02)
  other vias: 24.13,19.05
S$512  (via drill 0.3 pad 1.02)
  other vias: 24.13,20.32
S$513  (via drill 0.3 pad 1.02)
  other vias: 24.13,21.59
S$514  (via drill 0.3 pad 1.02)
  other vias: 21.59,16.51
S$515  (via drill 0.3 pad 1.02)
  other vias: 21.59,15.24
S$516  (via drill 0.3 pad 1.02)
  other vias: 22.86,16.51
S$517  (via drill 0.3 pad 1.02)
  other vias: 22.86,15.24
S$518  (via drill 0.3 pad 1.02)
  other vias: 24.13,15.24
S$519  (via drill 0.3 pad 1.02)
  other vias: 24.13,16.51
S$520  (via drill 0.3 pad 1.02)
  other vias: 24.13,17.78
S$521  (via drill 0.3 pad 1.02)
  other vias: 22.86,17.78
S$522  (via drill 0.3 pad 1.02)
  other vias: 21.59,17.78
S$523  (via drill 0.3 pad 1.02)
  other vias: 27.94,21.59
S$524  (via drill 0.3 pad 1.02)
  other vias: 25.4,21.59
S$525  (via drill 0.3 pad 1.02)
  other vias: 26.67,21.59
S$526  (via drill 0.3 pad 1.02)
  other vias: 26.67,19.05
S$527  (via drill 0.3 pad 1.02)
  other vias: 25.4,19.05
S$528  (via drill 0.3 pad 1.02)
  other vias: 25.4,20.32
S$529  (via drill 0.3 pad 1.02)
  other vias: 27.94,19.05
S$530  (via drill 0.3 pad 1.02)
  other vias: 27.94,20.32
S$531  (via drill 0.3 pad 1.02)
  other vias: 26.67,20.32
S$532  (via drill 0.3 pad 1.02)
  other vias: 25.4,16.51
S$533  (via drill 0.3 pad 1.02)
  other vias: 25.4,17.78
S$534  (via drill 0.3 pad 1.02)
  other vias: 27.94,16.51
S$535  (via drill 0.3 pad 1.02)
  other vias: 27.94,17.78
S$536  (via drill 0.3 pad 1.02)
  other vias: 26.67,17.78
S$537  (via drill 0.3 pad 1.02)
  other vias: 26.67,16.51
S$538  (via drill 0.3 pad 1.02)
  other vias: 25.4,15.24
S$539  (via drill 0.3 pad 1.02)
  other vias: 27.94,15.24
S$540  (via drill 0.3 pad 1.02)
  other vias: 26.67,15.24
S$541  (via drill 0.3 pad 1.02)
  other vias: 29.21,19.05
S$542  (via drill 0.3 pad 1.02)
  other vias: 29.21,20.32
S$543  (via drill 0.3 pad 1.02)
  other vias: 29.21,21.59
S$544  (via drill 0.3 pad 1.02)
  other vias: 30.48,21.59
S$545  (via drill 0.3 pad 1.02)
  other vias: 30.48,19.05
S$546  (via drill 0.3 pad 1.02)
  other vias: 30.48,20.32
S$547  (via drill 0.3 pad 1.02)
  other vias: 31.75,19.05
S$548  (via drill 0.3 pad 1.02)
  other vias: 31.75,20.32
S$549  (via drill 0.3 pad 1.02)
  other vias: 31.75,21.59
S$550  (via drill 0.3 pad 1.02)
  other vias: 29.21,16.51
S$551  (via drill 0.3 pad 1.02)
  other vias: 29.21,15.24
S$552  (via drill 0.3 pad 1.02)
  other vias: 30.48,16.51
S$553  (via drill 0.3 pad 1.02)
  other vias: 30.48,15.24
S$554  (via drill 0.3 pad 1.02)
  other vias: 31.75,15.24
S$555  (via drill 0.3 pad 1.02)
  other vias: 31.75,16.51
S$556  (via drill 0.3 pad 1.02)
  other vias: 31.75,17.78
S$557  (via drill 0.3 pad 1.02)
  other vias: 30.48,17.78
S$558  (via drill 0.3 pad 1.02)
  other vias: 29.21,17.78
S$559  (via drill 0.3 pad 1.02)
  other vias: 35.56,21.59
S$560  (via drill 0.3 pad 1.02)
  other vias: 33.02,21.59
S$561  (via drill 0.3 pad 1.02)
  other vias: 34.29,21.59
S$562  (via drill 0.3 pad 1.02)
  other vias: 34.29,19.05
S$563  (via drill 0.3 pad 1.02)
  other vias: 33.02,19.05
S$564  (via drill 0.3 pad 1.02)
  other vias: 33.02,20.32
S$565  (via drill 0.3 pad 1.02)
  other vias: 35.56,19.05
S$566  (via drill 0.3 pad 1.02)
  other vias: 35.56,20.32
S$567  (via drill 0.3 pad 1.02)
  other vias: 34.29,20.32
S$568  (via drill 0.3 pad 1.02)
  other vias: 33.02,16.51
S$569  (via drill 0.3 pad 1.02)
  other vias: 33.02,17.78
S$570  (via drill 0.3 pad 1.02)
  other vias: 35.56,16.51
S$571  (via drill 0.3 pad 1.02)
  other vias: 35.56,17.78
S$572  (via drill 0.3 pad 1.02)
  other vias: 34.29,17.78
S$573  (via drill 0.3 pad 1.02)
  other vias: 34.29,16.51
S$574  (via drill 0.3 pad 1.02)
  other vias: 33.02,15.24
S$575  (via drill 0.3 pad 1.02)
  other vias: 35.56,15.24
S$576  (via drill 0.3 pad 1.02)
  other vias: 34.29,15.24
S$577  (via drill 0.3 pad 1.02)
  other vias: 36.83,41.91
S$578  (via drill 0.3 pad 1.02)
  other vias: 36.83,43.18
S$579  (via drill 0.3 pad 1.02)
  other vias: 36.83,44.45
S$580  (via drill 0.3 pad 1.02)
  other vias: 38.1,44.45
S$581  (via drill 0.3 pad 1.02)
  other vias: 38.1,41.91
S$582  (via drill 0.3 pad 1.02)
  other vias: 38.1,43.18
S$583  (via drill 0.3 pad 1.02)
  other vias: 39.37,41.91
S$584  (via drill 0.3 pad 1.02)
  other vias: 39.37,43.18
S$585  (via drill 0.3 pad 1.02)
  other vias: 39.37,44.45
S$586  (via drill 0.3 pad 1.02)
  other vias: 36.83,39.37
S$587  (via drill 0.3 pad 1.02)
  other vias: 36.83,38.1
S$588  (via drill 0.3 pad 1.02)
  other vias: 38.1,39.37
S$589  (via drill 0.3 pad 1.02)
  other vias: 38.1,38.1
S$590  (via drill 0.3 pad 1.02)
  other vias: 39.37,38.1
S$591  (via drill 0.3 pad 1.02)
  other vias: 39.37,39.37
S$592  (via drill 0.3 pad 1.02)
  other vias: 39.37,40.64
S$593  (via drill 0.3 pad 1.02)
  other vias: 38.1,40.64
S$594  (via drill 0.3 pad 1.02)
  other vias: 36.83,40.64
S$595  (via drill 0.3 pad 1.02)
  other vias: 43.18,44.45
S$596  (via drill 0.3 pad 1.02)
  other vias: 40.64,44.45
S$597  (via drill 0.3 pad 1.02)
  other vias: 41.91,44.45
S$598  (via drill 0.3 pad 1.02)
  other vias: 41.91,41.91
S$599  (via drill 0.3 pad 1.02)
  other vias: 40.64,41.91
S$600  (via drill 0.3 pad 1.02)
  other vias: 40.64,43.18
S$601  (via drill 0.3 pad 1.02)
  other vias: 43.18,41.91
S$602  (via drill 0.3 pad 1.02)
  other vias: 43.18,43.18
S$603  (via drill 0.3 pad 1.02)
  other vias: 41.91,43.18
S$604  (via drill 0.3 pad 1.02)
  other vias: 40.64,39.37
S$605  (via drill 0.3 pad 1.02)
  other vias: 40.64,40.64
S$606  (via drill 0.3 pad 1.02)
  other vias: 43.18,39.37
S$607  (via drill 0.3 pad 1.02)
  other vias: 43.18,40.64
S$608  (via drill 0.3 pad 1.02)
  other vias: 41.91,40.64
S$609  (via drill 0.3 pad 1.02)
  other vias: 41.91,39.37
S$610  (via drill 0.3 pad 1.02)
  other vias: 40.64,38.1
S$611  (via drill 0.3 pad 1.02)
  other vias: 43.18,38.1
S$612  (via drill 0.3 pad 1.02)
  other vias: 41.91,38.1
S$613  (via drill 0.3 pad 1.02)
  other vias: 44.45,41.91
S$614  (via drill 0.3 pad 1.02)
  other vias: 44.45,43.18
S$615  (via drill 0.3 pad 1.02)
  other vias: 44.45,44.45
S$616  (via drill 0.3 pad 1.02)
  other vias: 45.72,44.45
S$617  (via drill 0.3 pad 1.02)
  other vias: 45.72,41.91
S$618  (via drill 0.3 pad 1.02)
  other vias: 45.72,43.18
S$619  (via drill 0.3 pad 1.02)
  other vias: 46.99,41.91
S$620  (via drill 0.3 pad 1.02)
  other vias: 46.99,43.18
S$621  (via drill 0.3 pad 1.02)
  other vias: 46.99,44.45
S$622  (via drill 0.3 pad 1.02)
  other vias: 44.45,39.37
S$623  (via drill 0.3 pad 1.02)
  other vias: 44.45,38.1
S$624  (via drill 0.3 pad 1.02)
  other vias: 45.72,39.37
S$625  (via drill 0.3 pad 1.02)
  other vias: 45.72,38.1
S$626  (via drill 0.3 pad 1.02)
  other vias: 46.99,38.1
S$627  (via drill 0.3 pad 1.02)
  other vias: 46.99,39.37
S$628  (via drill 0.3 pad 1.02)
  other vias: 46.99,40.64
S$629  (via drill 0.3 pad 1.02)
  other vias: 45.72,40.64
S$630  (via drill 0.3 pad 1.02)
  other vias: 44.45,40.64
S$631  (via drill 0.3 pad 1.02)
  other vias: 50.8,44.45
S$632  (via drill 0.3 pad 1.02)
  other vias: 48.26,44.45
S$633  (via drill 0.3 pad 1.02)
  other vias: 49.53,44.45
S$634  (via drill 0.3 pad 1.02)
  other vias: 49.53,41.91
S$635  (via drill 0.3 pad 1.02)
  other vias: 48.26,41.91
S$636  (via drill 0.3 pad 1.02)
  other vias: 48.26,43.18
S$637  (via drill 0.3 pad 1.02)
  other vias: 50.8,41.91
S$638  (via drill 0.3 pad 1.02)
  other vias: 50.8,43.18
S$639  (via drill 0.3 pad 1.02)
  other vias: 49.53,43.18
S$640  (via drill 0.3 pad 1.02)
  other vias: 48.26,39.37
S$641  (via drill 0.3 pad 1.02)
  other vias: 48.26,40.64
S$642  (via drill 0.3 pad 1.02)
  other vias: 50.8,39.37
S$643  (via drill 0.3 pad 1.02)
  other vias: 50.8,40.64
S$644  (via drill 0.3 pad 1.02)
  other vias: 49.53,40.64
S$645  (via drill 0.3 pad 1.02)
  other vias: 49.53,39.37
S$646  (via drill 0.3 pad 1.02)
  other vias: 48.26,38.1
S$647  (via drill 0.3 pad 1.02)
  other vias: 50.8,38.1
S$648  (via drill 0.3 pad 1.02)
  other vias: 49.53,38.1
S$649  (via drill 0.3 pad 1.02)
  other vias: 36.83,34.29
S$650  (via drill 0.3 pad 1.02)
  other vias: 36.83,35.56
S$651  (via drill 0.3 pad 1.02)
  other vias: 36.83,36.83
S$652  (via drill 0.3 pad 1.02)
  other vias: 38.1,36.83
S$653  (via drill 0.3 pad 1.02)
  other vias: 38.1,34.29
S$654  (via drill 0.3 pad 1.02)
  other vias: 38.1,35.56
S$655  (via drill 0.3 pad 1.02)
  other vias: 39.37,34.29
S$656  (via drill 0.3 pad 1.02)
  other vias: 39.37,35.56
S$657  (via drill 0.3 pad 1.02)
  other vias: 39.37,36.83
S$658  (via drill 0.3 pad 1.02)
  other vias: 36.83,31.75
S$659  (via drill 0.3 pad 1.02)
  other vias: 36.83,30.48
S$660  (via drill 0.3 pad 1.02)
  other vias: 38.1,31.75
S$661  (via drill 0.3 pad 1.02)
  other vias: 38.1,30.48
S$662  (via drill 0.3 pad 1.02)
  other vias: 39.37,30.48
S$663  (via drill 0.3 pad 1.02)
  other vias: 39.37,31.75
S$664  (via drill 0.3 pad 1.02)
  other vias: 39.37,33.02
S$665  (via drill 0.3 pad 1.02)
  other vias: 38.1,33.02
S$666  (via drill 0.3 pad 1.02)
  other vias: 36.83,33.02
S$667  (via drill 0.3 pad 1.02)
  other vias: 43.18,36.83
S$668  (via drill 0.3 pad 1.02)
  other vias: 40.64,36.83
S$669  (via drill 0.3 pad 1.02)
  other vias: 41.91,36.83
S$670  (via drill 0.3 pad 1.02)
  other vias: 41.91,34.29
S$671  (via drill 0.3 pad 1.02)
  other vias: 40.64,34.29
S$672  (via drill 0.3 pad 1.02)
  other vias: 40.64,35.56
S$673  (via drill 0.3 pad 1.02)
  other vias: 43.18,34.29
S$674  (via drill 0.3 pad 1.02)
  other vias: 43.18,35.56
S$675  (via drill 0.3 pad 1.02)
  other vias: 41.91,35.56